# Altium PCB Panel-Simple1402 - final.PcbDoc
Units mm, origin at the board's own origin, x right, y up, seen from the top; angles counter-clockwise.
Board outline 31.26 x 43.1 mm, 2 copper layers (Top Layer, Bottom Layer); 14 components, 0 nets, 93 pads, 17 vias.
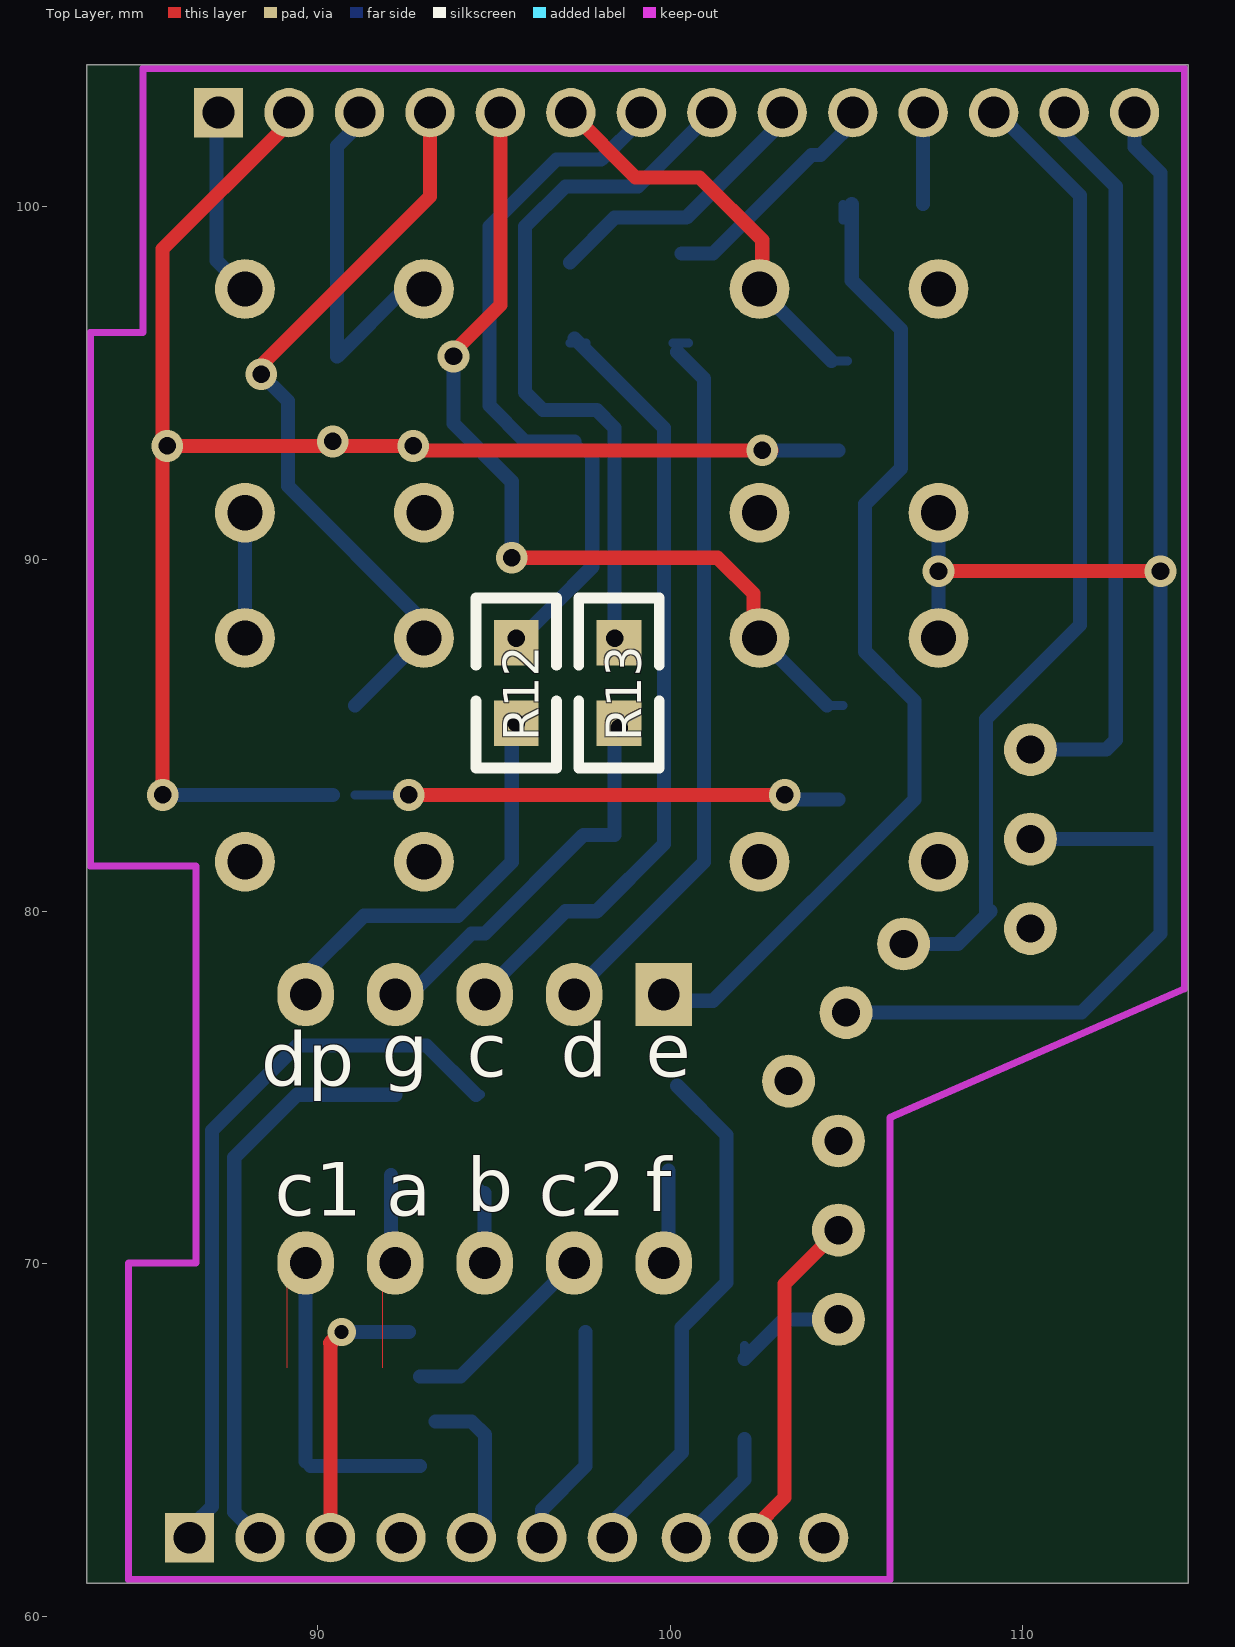
[diagram p0: Top Layer view]
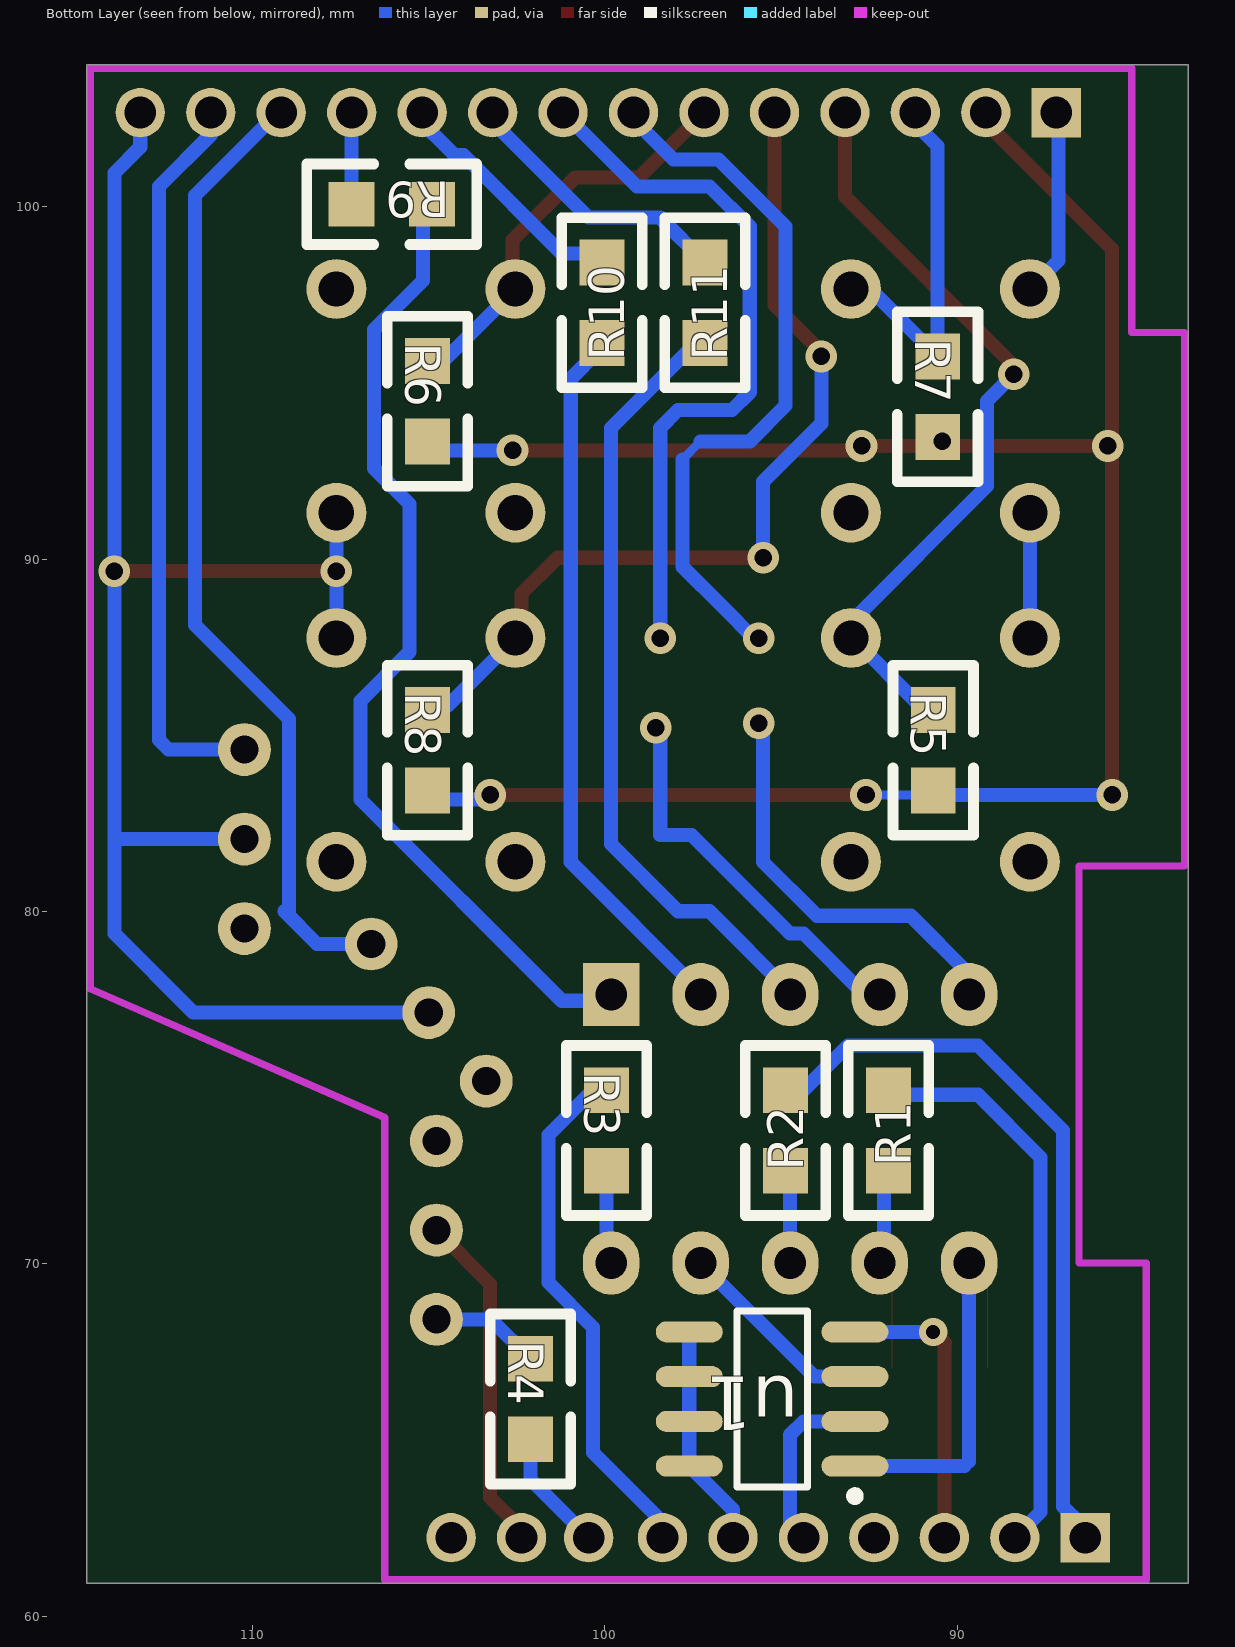
[diagram p1: Bottom Layer view, seen from below]

## Layer stack, top to bottom
Top Solder: solder mask 0.0102, Solder Resist, Dk 3.5
Top Layer: signal copper 0.0356
Dielectric1: dielectric 0.32, FR-4, Dk 4.8
Bottom Layer: signal copper 0.0356
Bottom Solder: solder mask 0.0102, Solder Resist, Dk 3.5

## Board outline
83.441,60.935 114.704,60.935 114.704,104.038 83.441,104.038

## Design rules (kind name [scope] priority, off if disabled: settings)
Clearance [All] p1: gap=0.254
FanoutControl Fanout_Small [All] p1 off: bgadir=Out bgaviamode=Centered fanoutstyle=Auto fanoutdirection=Alternating viagrid=0.025 // Protel DXP Scope 1 Expression Was: (CompPinCount < 5)   Fanout_Small (Default Rule)
FanoutControl Fanout_Default [All] p2: bgadir=Out bgaviamode=Centered fanoutstyle=Auto fanoutdirection=Alternating viagrid=0.025 // Fanout_Default (Default Rule)
FanoutControl Fanout_SOIC [All] p3 off: bgadir=Out bgaviamode=Centered fanoutstyle=Auto fanoutdirection=Alternating viagrid=0.025 // Protel DXP Scope 1 Expression Was: IsSOIC   Fanout_SOIC (Default Rule)
FanoutControl Fanout_BGA [All] p4 off: bgadir=Out bgaviamode=Centered fanoutstyle=Auto fanoutdirection=Alternating viagrid=0.025 // Protel DXP Scope 1 Expression Was: IsBGA   Fanout_BGA (Default Rule)
FanoutControl Fanout_LCC [All] p5 off: bgadir=Out bgaviamode=Centered fanoutstyle=Auto fanoutdirection=Alternating viagrid=0.025 // Protel DXP Scope 1 Expression Was: IsLCC   Fanout_LCC (Default Rule)
PolygonConnect [All] p1: connectstyle=Relief reliefconductorwidth=0.254 reliefentries=4 polygonreliefangle="90 Angle" airgapwidth=0.254
RoutingVias [All] p1: holewidth=0.711 width=1.27 viastyle="Through Hole" minholewidth=0.711 minwidth=1.27 maxholewidth=0.711 maxwidth=1.27
SilkToSolderMaskClearance [All] p1 off: minsilkscreentomaskgap=0.254 clearancetoexposedcopper=TRUE // Protel DXP Scope 1 Expression Was: IsPad
SolderMaskExpansion [All] p1: expansion=0.102
UnpouredPolygon [All] p1: allowunpoured=FALSE
Width [All] p1: maxlimit=0.254 minlimit=0.254 preferedwidth=0.254
23 further rules are at their usual default settings.

## Components (designator, comment, footprint, x,y, rotation, side; value= is the part's Value field where it differs from the comment)
R1 "560" 0805 91.948,74.93 r270 bottom
R2 "560" 0805 94.869,74.93 r270 bottom
R3 "560" 0805 99.949,72.644 r90 bottom
R4 "560" 0805 102.108,65.024 r90 bottom
R5 "10K" 0805 90.678,83.439 r90 bottom
R6 "10K" 0805 105.029,93.345 r90 bottom
R7 "10K" 0805 90.551,93.472 r90 bottom
R8 "10K" 0805 105.029,83.439 r90 bottom
R9 "10K" 0805 107.188,100.076 r180 bottom
R10 "10K" 0805 100.076,98.425 r270 bottom
R11 "10K" 0805 97.155,98.425 r270 bottom
R12 "560" 0805 95.631,87.63 r270 top
R13 "560" 0805 98.552,87.63 r270 top
u1 "Comment" SO8_L 95.25,66.167 r0 bottom

## Footprints (in the part's own frame and the unit in brackets; to place one, negate y for a bottom-side part, rotate by r counter-clockwise, add the part's x,y. Pads: shape width x height; smd on the part's side, far side on the other; paste and mask are expansions set on the pad)
0805 [mm]
  rect 1.3x1.27 smd: 1(0,0) 2(2.286,0)
  silkscreen extent -1.27,-1.14 3.56,1.14
SO8_L [mm] "SOIC, 8-Leads, Body 4.9x3.9mm, Pitch 1.27mm, IPC High Density"
  oval 1.9x0.6 smd: 1(-2.35,1.905) 2(-2.35,0.635) 3(-2.35,-0.635) 4(-2.35,-1.905) 5(2.35,-1.905) 6(2.35,-0.635) 7(2.35,0.635) 8(2.35,1.905)
  silkscreen extent -2.47,-2.5 1,2.88, body extent -2,-2.5 2,2.5, height 1.75

## Free pads (board coordinates)
  rect 1.4x1.4 hole 0.9: 1(86.36,62.23) 1(87.183,102.678)
  rect 1.6x1.8 hole 0.9: 1(99.817,77.647)
  round 1.5 hole 0.8: 1(110.227,84.599) 2(110.227,82.059) 3(110.227,79.519) 4(106.629,79.08) 5(104.996,77.134) 6(103.363,75.188) 7(104.777,73.489) 8(104.777,70.959) 9(104.777,68.428)
  round 1.4 hole 0.9: 2(88.36,62.23) 2(89.183,102.678) 3(90.36,62.23) 3(91.183,102.678) 4(92.36,62.23) 4(93.183,102.678) 5(94.36,62.23) 5(95.183,102.678) 6(96.36,62.23) 6(97.183,102.678) 7(98.36,62.23) 7(99.183,102.678) 7(100.457,62.23) 8(101.183,102.678) 8(102.36,62.23) 9(103.183,102.678) 9(104.36,62.23) 10(105.183,102.678) 11(107.183,102.678) 12(109.183,102.678) 13(111.183,102.678) 14(113.183,102.678)
  oval 1.6x1.8 hole 0.9: 2(97.277,77.647) 3(94.737,77.647) 4(92.197,77.647) 5(89.657,77.647) 6(89.657,70.027) 7(92.197,70.027) 8(94.737,70.027) 9(97.277,70.027) 10(99.817,70.027)
  round 1.7 hole 1: 34(87.932,97.672) 35(93.012,97.672) 36(102.537,97.672) 37(107.617,97.672) 38(107.617,91.322) 39(102.537,91.322) 40(93.012,91.322) 41(87.932,91.322) 42(87.932,87.766) 43(93.012,87.766) 44(102.537,87.766) 45(107.617,87.766) 46(107.617,81.416) 47(102.537,81.416) 48(93.012,81.416) 49(87.932,81.416)

## Via types
v1: diameter 0.9, hole 0.5, Top Layer to Bottom Layer, 16 vias
v2: diameter 0.8, hole 0.4, Top Layer to Bottom Layer, 1 vias

## Nets (pads, with @x,y where several pads share a name; then routed paths per layer and width w, separated by ;. In a path a pad name is that pad's centre, name@x,y a point inside that pad or via, vN(x,y) a via of type N, cw(c..) or ccw(c..) an arc to the next point about the centre after c; other vN are vias at no path point)
pads on no net: R1.1 R1.2 R2.1 R2.2 R3.1 R3.2 R4.1 R4.2 R5.1 R5.2 R6.1 R6.2 R7.1 R7.2 R8.1 R8.2 R9.1 R9.2 R10.1 R10.2 R11.1 R11.2 R12.1 R12.2 R13.1 R13.2 u1.1 u1.2 u1.3 u1.4 u1.5 u1.6 u1.7 u1.8
copper on no net: | length 505.5
  Top Layer w0: 89.129,67.056 89.129,70.195 ; 91.846,67.056 91.846,69.698
  Top Layer w0.254: 89.027,102.235 89.027,102.87 ; v2@90.805,67.945 v2@90.932,68.072
  Top Layer w0.4: v1(85.598,83.312) 85.598,98.806 89.027,102.235 ; v1(85.725,93.218) v1(92.71,93.218) ; v1@88.265,95.377 93.183,100.295 93.183,102.678 ; 90.36,62.23 90.36,67.754 ; v1(92.583,83.312) v1(103.251,83.312) ; v1@92.837,93.091 v1@102.87,93.091 ; v1@93.853,95.885 95.183,97.215 95.183,102.678 ; v1@95.377,90.043 101.346,90.043 102.362,89.027 102.362,87.757 ; 97.183,102.678 99.023,100.838 100.838,100.838 102.616,99.06 102.616,97.593 ; 102.362,62.484 103.251,63.373 103.251,69.433 104.777,70.959 ; v1(107.617,89.662) v1(113.919,89.662)
  Top Layer w0.43: 90.36,67.754 v2(90.678,68.072)
  Bottom Layer w0.254: 89.657,64.394 89.789,64.262 ; 89.657,78.1 89.657,77.647 89.657,78.227 ; v1(90.424,93.345) v1@90.551,93.218 ; 91.059,83.312 v1(92.583,83.312) ; 91.183,102.359 91.183,102.678 ; 92.075,70.148 92.075,70.612 ; 92.197,77.647 92.633,77.647 ; 92.36,62.23 92.837,62.23 ; 92.465,97.672 93.012,97.672 ; 92.973,88.256 92.973,87.766 93.012,87.766 ; 94.361,61.976 94.742,62.357 ; 94.488,74.803 94.615,74.803 ; 94.615,72.136 94.737,72.014 ; 94.737,77.647 94.737,77.719 ; v1@95.504,85.217 v1(95.631,85.344) ; v1(95.631,87.757) v1@95.758,87.757 ; 97.155,96.139 97.606,96.139 ; 97.277,77.647 97.277,77.719 ; 97.282,93.345 97.79,92.837 ; 98.36,62.23 98.36,62.673 ; v1@98.425,85.09 v1(98.552,85.217) ; 99.183,102.485 99.183,102.678 ; 100.076,96.139 100.527,96.139 ; 102.108,67.31 102.108,67.691 ; 102.362,61.976 102.362,62.611 102.362,62.232 102.362,62.484 ; 102.537,91.322 102.616,91.4 ; 102.997,102.235 102.997,102.616 ; v1(103.251,83.312) v1@103.378,83.185 ; 104.451,85.852 104.902,85.852 ; 104.578,95.631 105.029,95.631 ; 104.902,99.625 104.902,100.076 ; 106.629,79.08 108.163,79.08 108.331,79.248 108.966,79.883 ; 107.183,100.081 107.188,100.076 ; 113.809,82.059 113.919,82.169
  Bottom Layer w0.4: v1(85.598,83.312) 90.424,83.312 ; 86.487,62.611 86.995,63.119 86.995,73.787 89.408,76.2 93.091,76.2 94.488,74.803 ; 87.122,102.489 87.122,98.482 87.932,97.672 ; 87.932,87.766 87.932,91.322 ; v1@88.265,95.377 89.154,94.488 89.154,92.075 92.973,88.256 ; 88.36,62.23 87.63,62.96 87.63,73.025 89.408,74.803 92.202,74.803 ; 89.657,64.394 89.657,70.027 ; 89.657,78.227 91.313,79.883 93.98,79.883 95.504,81.407 95.504,82.296 v1@95.504,85.217 ; 89.789,64.262 92.9,64.262 ; v2@90.932,68.072 92.583,68.072 ; 91.059,85.852 92.973,87.766 ; 91.183,102.359 90.551,101.727 90.551,95.758 92.465,97.672 ; 92.075,70.148 92.075,72.517 ; 92.633,77.647 94.361,79.375 94.742,79.375 97.536,82.169 98.425,82.169 v1@98.425,85.09 ; 92.9,66.802 94.052,66.802 97.277,70.027 ; 93.345,65.532 94.361,65.532 94.742,65.151 94.742,64.135 94.742,62.357 ; v1@93.853,95.885 93.853,93.853 95.504,92.202 v1(95.504,90.043) ; 94.737,70.027 94.737,72.014 ; 94.737,77.719 97.028,80.01 97.917,80.01 99.822,81.915 99.822,93.726 97.282,96.266 ; v1@95.758,87.757 96.647,88.646 97.79,89.789 97.79,92.837 ; 96.36,62.23 96.36,63.022 97.6,64.262 97.6,68.072 ; 97.155,98.425 98.425,99.695 100.457,99.695 102.997,102.235 ; 97.277,77.719 100.965,81.407 100.965,95.123 100.203,95.885 ; 97.282,93.345 95.885,93.345 94.869,94.361 94.869,99.441 96.774,101.346 98.044,101.346 99.183,102.485 ; 98.36,62.673 100.33,64.643 100.33,68.199 101.6,69.469 101.6,73.66 100.203,75.057 ; v1(98.425,87.757) 98.425,93.726 97.917,94.234 96.393,94.234 95.885,94.742 95.885,99.441 97.028,100.584 99.089,100.584 101.183,102.678 ; 99.949,70.231 99.949,72.644 ; 99.949,77.47 101.219,77.47 106.934,83.185 106.934,85.979 105.537,87.376 105.537,91.567 106.553,92.583 106.553,96.52 105.156,97.917 105.156,100.076 ; 100.33,98.679 101.219,98.679 104.013,101.473 104.267,101.473 105.41,102.616 ; 100.457,62.23 102.108,63.881 102.108,65.024 ; 102.108,67.31 103.226,68.428 104.777,68.428 ; 102.537,87.766 104.451,85.852 ; 102.537,97.672 104.578,95.631 ; v1(102.616,93.091) 104.775,93.091 ; v1@103.378,83.185 104.775,83.185 ; 104.996,77.134 111.678,77.134 113.919,79.375 113.919,82.169 113.919,100.965 113.183,101.701 113.183,102.678 ; 106.629,79.08 108.163,79.08 109.093,80.01 ; 107.183,100.081 107.183,102.678 ; 107.617,87.766 107.617,91.322 ; 108.966,79.883 108.966,81.661 108.966,85.471 111.633,88.138 111.633,100.33 109.093,102.87 ; 110.227,82.059 113.809,82.059 ; 110.227,84.599 112.378,84.599 112.649,84.869 112.649,100.584 111.183,102.05 111.183,102.678
  other v1: 88.392,95.25 93.853,95.758

## Keep-outs
Keep-Out Layer:
  lines w0.203: 83.542,81.291 86.542,81.291 86.542,70.029 84.63,70.029 84.63,61.037 106.242,61.037 106.242,74.156 114.602,77.813 114.602,103.937 85.042,103.937 85.042,96.437 83.542,96.437 83.542,81.291

## Other copper
Bottom Layer:

## Silkscreen, mask and mechanical layers (free items; w line width, h text height)
Top Overlay:
  text "g" at 91.821,75.311 h1.52
  text "c" at 94.234,75.311 h1.52
  text "d" at 96.901,75.311 h1.52
  text "e" at 99.314,75.311 h1.52
  text "dp" at 88.392,75.057 h1.52
  text "b" at 94.234,71.501 h1.52
  text "f" at 99.314,71.501 h1.52
  text "c1" at 88.773,71.374 h1.52
  text "a" at 91.948,71.374 h1.52
  text "c2" at 96.266,71.374 h1.52